# Altium PCB V2_Slit_Lamp_PCB.PcbDoc (part 2 of 2)
Units mm, origin at the board's own origin, x right, y up, seen from the top; angles counter-clockwise.
Board outline 40 x 62 mm, 2 copper layers (Top, Bottom); 34 components, 34 nets, 166 pads, 7 vias.
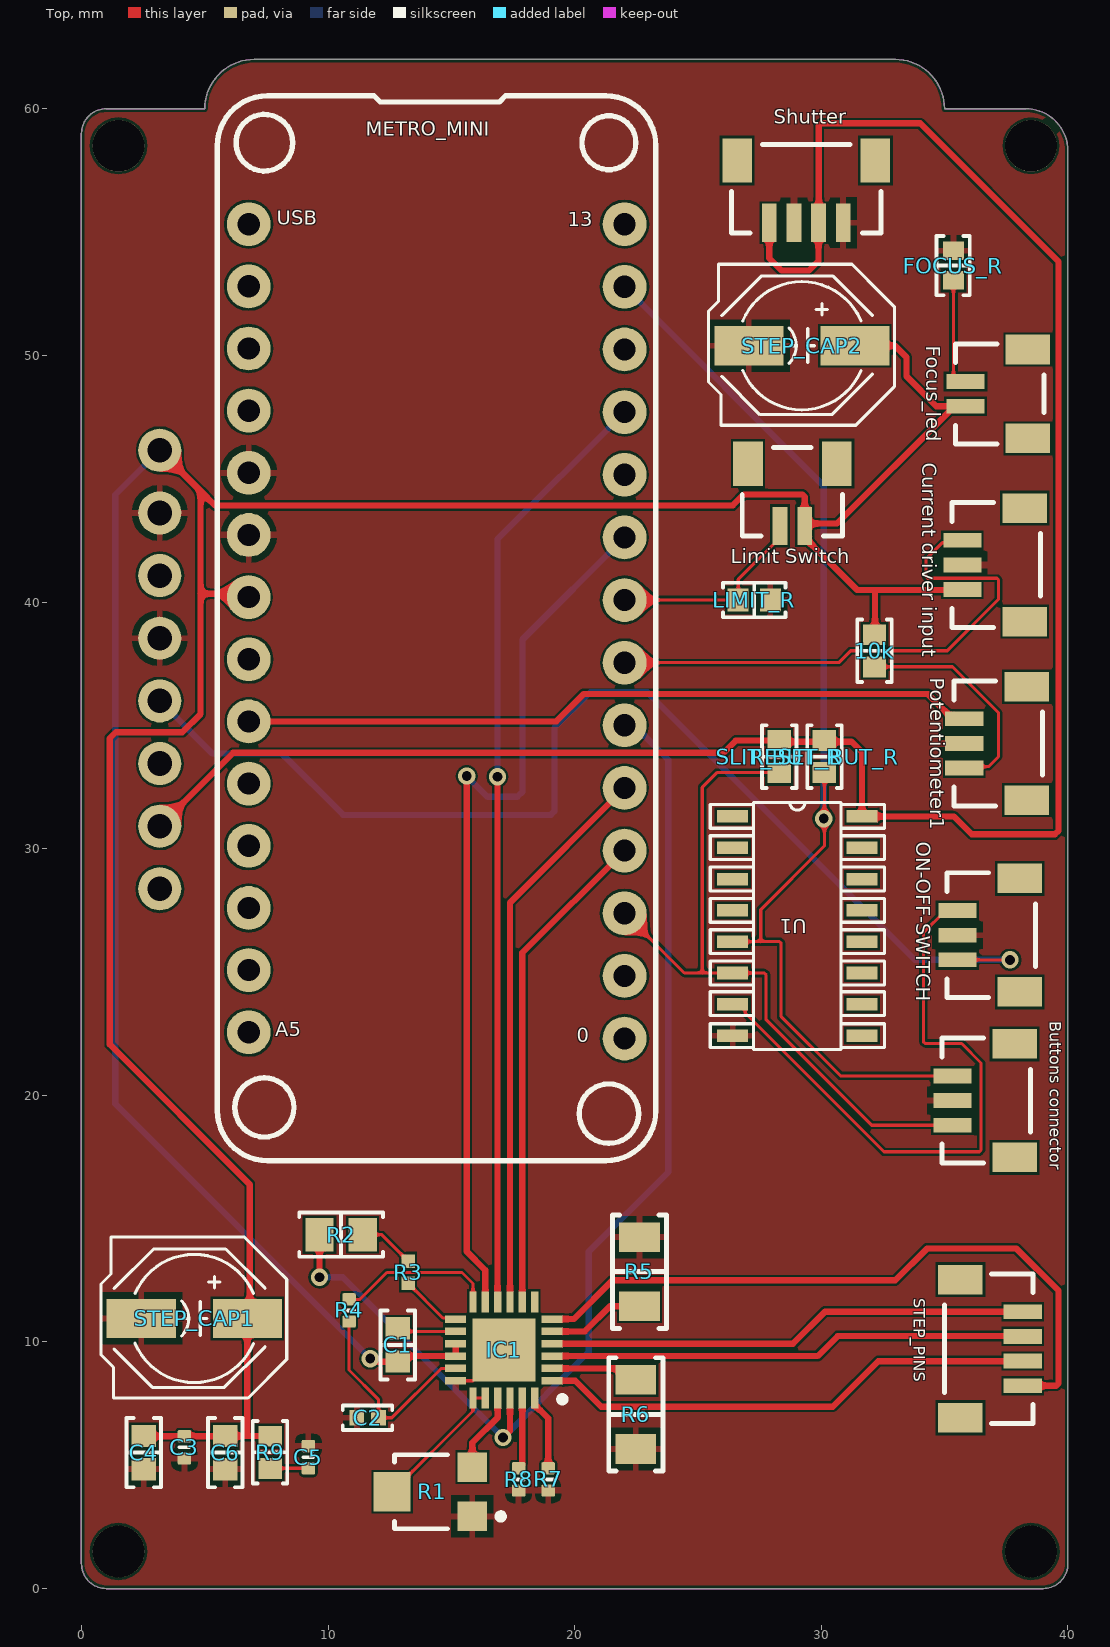
[diagram p0: Top view]

## Part data (continued)
R7 R8: library part CMP-009-00137-2, "Chip Resistor, 47,5 kOhms, +/-1 %, 63 mW, -55 to 155 degC, 0402", Case Code (Imperial)=0603, Case Code (Metric)=1608, Case/Package=0402, Manufacturer 1=Vishay, Manufacturer Part Number 1=CRCW060347R0FKEA, Max Operating Temperature=155°C, Max Power Dissipation=100mW, Min Operating Temperature=-55°C, Package Quantity=10, Power=63mW, Resistance=47R, Supplier Part Number 1=541-47.0HCT-ND, Temperature Coefficient=100ppm/°C, Tolerance=1%, Voltage Rating=75V, Category="Chip SMD Resistors", ComponentLink1Description=https://datasheet.ciiva.com:443/pdfs/VipMasterIC/IC/VISH/VISH-S-A0007266705/VISH-S-A0007266705-1.pdf?src-supplier=IHS+Markit, ComponentLink1URL=https://datasheet.ciiva.com:443/pdfs/VipMasterIC/IC/VISH/VISH-S-A0007266705/VISH-S-A0007266705-1.pdf?src-supplier=IHS+Markit, ComponentLink2Description=https://datasheet.ciiva.com/11810/0900766b80d98afc-11810171.pdf?src-supplier=RSComponents, ComponentLink2URL=https://datasheet.ciiva.com/11810/0900766b80d98afc-11810171.pdf?src-supplier=RSComponents, ComponentLink3Description=https://datasheet.ciiva.com/3257/dcrcwe3-3257637.pdf?src-supplier=Avnet, ComponentLink3URL=https://datasheet.ciiva.com/3257/dcrcwe3-3257637.pdf?src-supplier=Avnet, ComponentLink4Description=https://datasheet.ciiva.com/7777/1697337-7777333.pdf?src-supplier=Element14, ComponentLink4URL=https://datasheet.ciiva.com/7777/1697337-7777333.pdf?src-supplier=Element14, ComponentLink5Description=https://datasheet.ciiva.com/22872/70201119-22872069.pdf?src-supplier=Allied+Electronics, ComponentLink5URL=https://datasheet.ciiva.com/22872/70201119-22872069.pdf?src-supplier=Allied+Electronics, ComponentLink6Description=https://datasheet.ciiva.com/7777/1697337-7777334.pdf?src-supplier=Element14, ComponentLink6URL=https://datasheet.ciiva.com/7777/1697337-7777334.pdf?src-supplier=Element14, ComponentLink7Description=https://datasheet.ciiva.com/2465/dcrcwe3-2465675.pdf?src-supplier=Digi-Key, ComponentLink7URL=https://datasheet.ciiva.com/2465/dcrcwe3-2465675.pdf?src-supplier=Digi-Key, ComponentLink8Description=https://datasheet.ciiva.com/2465/dcrcwe3-2465676.pdf?src-supplier=Digi-Key, ComponentLink8URL=https://datasheet.ciiva.com/2465/dcrcwe3-2465676.pdf?src-supplier=Digi-Key, ComponentLink9Description=https://datasheet.ciiva.com/5549/dcrcwe3-109170-5549100.pdf?src-supplier=Mouser, ComponentLink9URL=https://datasheet.ciiva.com/5549/dcrcwe3-109170-5549100.pdf?src-supplier=Mouser, ComponentLink10Description=https://datasheet.ciiva.com/16777/70201119-16777404.pdf?src-supplier=Allied+Electronics, ComponentLink10URL=https://datasheet.ciiva.com/16777/70201119-16777404.pdf?src-supplier=Allied+Electronics, ComponentLink11Description=https://datasheet.ciiva.com/22700/1697337-22700364.pdf?src-supplier=Element14, ComponentLink11URL=https://datasheet.ciiva.com/22700/1697337-22700364.pdf?src-supplier=Element14, ComponentLink12Description=https://datasheet.ciiva.com/2465/dcrcwe3-2465677.pdf?src-supplier=Digi-Key, ComponentLink12URL=https://datasheet.ciiva.com/2465/dcrcwe3-2465677.pdf?src-supplier=Digi-Key, ComponentLink13Description=https://datasheet.ciiva.com/26316/fld-crcw-e3-data-en-26316558.pdf?src-supplier=Distrelec, ComponentLink13URL=https://datasheet.ciiva.com/26316/fld-crcw-e3-data-en-26316558.pdf?src-supplier=Distrelec, Composition="Thick Film", Contact Plating=Tin, Depth=0.85mm, Features="Automotive AEC-Q200", Height=0.45mm, Lead Free="Lead Free", Length=1.55mm, Military Standard=Not, Mount="Surface Mount", Number of Pins=2, Number of Terminations=2, Packaging="Tape and Reel", Pins=2, Power Rating=100mW, Pricing 1="1=0.10000, 10=0.03300, 100=0.01340, 1000=0.00602, 2500=0.00522 (USD)", Radiation Hardening=No, REACH SVHC=Unknown, RoHS=Yes, Stock 1=1712, Supplier 1=Digi-Key, Termination=SMD/SMT, Voltage Rating (DC)=75V, Weight=7.1E-05oz, Width=0.033inch
R9: library part "1 ohm RES", "Fixed Resistor, Metal Glaze/thick Film, 0.1W, 1ohm, 75V, 1% +/-Tol, 100ppm/Cel, Surface Mount, 0603", Case Code (Imperial)=0603, Case Code (Metric)=1608, Manufacturer 2="Vishay Dale", Manufacturer Part Number 2=CRCW06031R00FKEA, Max Operating Temperature=155°C, Max Power Dissipation=100mW, Min Operating Temperature=-55°C, Package Quantity=10, Resistance=1R, Supplier Part Number 1=541-1.00HCT-ND, Temperature Coefficient=100ppm/°C, Tolerance=1%, Voltage Rating=75V, Case/Package=0603, Category="Chip SMD Resistors", ComponentLink1Description=https://datasheet.ciiva.com:443/pdfs/VipMasterIC/IC/VISH/VISH-S-A0007266705/VISH-S-A0007266705-1.pdf?src-supplier=IHS+Markit, ComponentLink1URL=https://datasheet.ciiva.com:443/pdfs/VipMasterIC/IC/VISH/VISH-S-A0007266705/VISH-S-A0007266705-1.pdf?src-supplier=IHS+Markit, ComponentLink2Description=https://datasheet.ciiva.com/7792/1359337-7792119.pdf?src-supplier=Element14, ComponentLink2URL=https://datasheet.ciiva.com/7792/1359337-7792119.pdf?src-supplier=Element14, ComponentLink3Description=https://datasheet.ciiva.com/2465/dcrcwe3-2465529.pdf?src-supplier=Digi-Key, ComponentLink3URL=https://datasheet.ciiva.com/2465/dcrcwe3-2465529.pdf?src-supplier=Digi-Key, ComponentLink4Description=https://datasheet.ciiva.com/3257/dcrcwe3-3257225.pdf?src-supplier=Avnet, ComponentLink4URL=https://datasheet.ciiva.com/3257/dcrcwe3-3257225.pdf?src-supplier=Avnet, ComponentLink5Description=https://datasheet.ciiva.com/16883/dcrcwe3-16883290.pdf?src-supplier=Avnet+Europe, ComponentLink5URL=https://datasheet.ciiva.com/16883/dcrcwe3-16883290.pdf?src-supplier=Avnet+Europe, ComponentLink6Description=https://datasheet.ciiva.com/16768/70201119-16768957.pdf?src-supplier=Allied+Electronics, ComponentLink6URL=https://datasheet.ciiva.com/16768/70201119-16768957.pdf?src-supplier=Allied+Electronics, ComponentLink7Description=https://datasheet.ciiva.com/28621/1747939-28621389.pdf?src-supplier=Element14, ComponentLink7URL=https://datasheet.ciiva.com/28621/1747939-28621389.pdf?src-supplier=Element14, ComponentLink8Description=https://datasheet.ciiva.com/5541/dcrcwe3-109170-5541726.pdf?src-supplier=Mouser, ComponentLink8URL=https://datasheet.ciiva.com/5541/dcrcwe3-109170-5541726.pdf?src-supplier=Mouser, ComponentLink9Description=https://datasheet.ciiva.com/2465/dcrcwe3-2465528.pdf?src-supplier=Digi-Key, ComponentLink9URL=https://datasheet.ciiva.com/2465/dcrcwe3-2465528.pdf?src-supplier=Digi-Key, ComponentLink10Description=https://datasheet.ciiva.com/2465/dcrcwe3-2465530.pdf?src-supplier=Digi-Key, ComponentLink10URL=https://datasheet.ciiva.com/2465/dcrcwe3-2465530.pdf?src-supplier=Digi-Key, ComponentLink11Description=https://datasheet.ciiva.com/3257/dcrcwe3-3257226.pdf?src-supplier=Avnet, ComponentLink11URL=https://datasheet.ciiva.com/3257/dcrcwe3-3257226.pdf?src-supplier=Avnet, Composition="Thick Film", Contact Plating=Tin, Depth=0.85mm, Features="Automotive AEC-Q200", Height=0.02inch, Lead Free="Lead Free", Length=1.55mm, Military Standard=Not, Mount="Surface Mount", Number of Pins=2, Number of Terminations=2, Packaging="Tape and Reel", Power Rating=100mW, Pricing 2="5000=0.00400, 10000=0.00400 (USD)", Radiation Hardening=No, REACH SVHC=Unknown, RoHS=Yes, Stock 2=110000, Supplier 1=Digi-Key, Supplier 2=Newark, Supplier Part Number 2=52K8059, Termination=SMD/SMT, Voltage Rating (DC)=75V, Weight=7.1E-05oz, Width=0.033inch
Shutter STEP_PINS: library part BM04B-SRSS-TB, "JST SH series header 1.00mm pitch disconnectable crimp style connectors, vertical (side entry type), 4 pins", Color=Natural, Contact Resistance=40mR, Current Rating=1A, Flammability Rating="UL94 V-0", Housing Color=Beige, Insulation Resistance=100MR, Manufacturer 1=JST, Manufacturer Part Number 1=BM04B-SRSS-TB(LF)(SN), Max Operating Temperature=85°C, Max Voltage Rating (AC)=50V, Min Operating Temperature=-25°C, Supplier Part Number 1=455-1790-1-ND, ComponentLink1Description=https://datasheet.ciiva.com/26894/getdatasheetpartid-690899-26894827.pdf?src-supplier=Verical, ComponentLink1URL=https://datasheet.ciiva.com/26894/getdatasheetpartid-690899-26894827.pdf?src-supplier=Verical, ComponentLink2Description=https://datasheet.ciiva.com/26924/getdatasheetpartid-708793-26924043.pdf?src-supplier=Verical, ComponentLink2URL=https://datasheet.ciiva.com/26924/getdatasheetpartid-708793-26924043.pdf?src-supplier=Verical, ComponentLink3Description=https://datasheet.ciiva.com/16211/esr-16211085.pdf?src-supplier=Future+Electronics, ComponentLink3URL=https://datasheet.ciiva.com/16211/esr-16211085.pdf?src-supplier=Future+Electronics, Connector Type="Male Pin", Contact Material="Copper Alloy", Contact Plating=Tin,Lead,Copper, Depth=2.9mm, DeviceName=-TB, DeviceSetName=BM04B-SRSS, GateName_1=G$1, Gender=Male, Housing Material=Polyamide, Lead Free="Lead Free", Lead Pitch=1mm, Length=6mm, LibraryName="con-JST SH", Material=Polyamide, Max Current Rating=1A, Max Voltage Rating (DC)=50V, Mount="Surface Mount", Number of Contacts=4, Number of Positions=4, Number of Rows=1, Orientation=Straight, Packaging="Tape and Reel", Pitch=0.039inch, Pricing 1="1=0.630000, 10=0.592000, 100=0.454000, 500=0.394800 (USD)", REACH SVHC="No SVHC", RoHS=Yes, Stock 1=5100, Supplier 1=Digi-Key, Supplier 2=Arrow, Supplier Part Number 2="BM04B-SRSS-TB (LF)(SN)", SymbolName_1=M_1R04, Termination=Solder, Voltage Rating (AC)=50V
STEP_CAP1 STEP_CAP2: library part 100UF-POLARIZED_SMD_16V-20%_L6.6-W6.6, "100uF/ 16V", Capacitance=100uF, Case/Package=Radial, Dielectric Material=Aluminium, ESR (Equivalent Series Resistance)=360mR, Leakage Current=3uA, Manufacturer="Panasonic Electronic Components", Max Operating Temperature=105°C, Min Operating Temperature=-55°C, MPN=EEE-FK1C101P, Package Quantity=1000, Ripple Current=240mA, Supplier Part Number 1=PCE3783CT-ND, Tolerance=20%, Voltage=16V, +=+, ComponentLink1Description=https://datasheet.ciiva.com/19479/1357482-19479360.pdf?src-supplier=Jameco, ComponentLink1URL=https://datasheet.ciiva.com/19479/1357482-19479360.pdf?src-supplier=Jameco, ComponentLink2Description=https://datasheet.ciiva.com/11777/0900766b80e4e8b0-11777237.pdf?src-supplier=RSComponents, ComponentLink2URL=https://datasheet.ciiva.com/11777/0900766b80e4e8b0-11777237.pdf?src-supplier=RSComponents, ComponentLink3Description=https://datasheet.ciiva.com/29313/443464-da-01-en-smd-elko-vfk-d-100-uf-16v-29313488.pdf?src-supplier=Conrad, ComponentLink3URL=https://datasheet.ciiva.com/29313/443464-da-01-en-smd-elko-vfk-d-100-uf-16v-29313488.pdf?src-supplier=Conrad, ComponentLink4Description=https://datasheet.ciiva.com/2983/aba0000ce120-2983939.pdf?src-supplier=Avnet, ComponentLink4URL=https://datasheet.ciiva.com/2983/aba0000ce120-2983939.pdf?src-supplier=Avnet, ComponentLink5Description=https://datasheet.ciiva.com/43463/58258-43463495.pdf?src-supplier=Farnell, ComponentLink5URL=https://datasheet.ciiva.com/43463/58258-43463495.pdf?src-supplier=Farnell, ComponentLink6Description=https://datasheet.ciiva.com/46376/1676921-46376425.pdf?src-supplier=Element14, ComponentLink6URL=https://datasheet.ciiva.com/46376/1676921-46376425.pdf?src-supplier=Element14, ComponentLink7Description=https://datasheet.ciiva.com/24022/aba0000ce120-24022554.pdf?src-supplier=Mouser, ComponentLink7URL=https://datasheet.ciiva.com/24022/aba0000ce120-24022554.pdf?src-supplier=Mouser, ComponentLink8Description=https://datasheet.ciiva.com/16539/aba0000ce120-16539980.pdf?src-supplier=Avnet+Asia, ComponentLink8URL=https://datasheet.ciiva.com/16539/aba0000ce120-16539980.pdf?src-supplier=Avnet+Asia, ComponentLink9Description=https://datasheet.ciiva.com/25899/aba0000ce120-25899324.pdf?src-supplier=Avnet+Europe, ComponentLink9URL=https://datasheet.ciiva.com/25899/aba0000ce120-25899324.pdf?src-supplier=Avnet+Europe, ComponentLink10Description=https://datasheet.ciiva.com/30177/aba0000ce120-30177788.pdf?src-supplier=Onlinecomponents.com, ComponentLink10URL=https://datasheet.ciiva.com/30177/aba0000ce120-30177788.pdf?src-supplier=Onlinecomponents.com, ComponentLink11Description=https://datasheet.ciiva.com/14601/70255214-14601005.pdf?src-supplier=Allied+Electronics, ComponentLink11URL=https://datasheet.ciiva.com/14601/70255214-14601005.pdf?src-supplier=Allied+Electronics, ComponentLink12Description=https://datasheet.ciiva.com/16449/aba0000ce120-16449534.pdf?src-supplier=Future+Electronics, ComponentLink12URL=https://datasheet.ciiva.com/16449/aba0000ce120-16449534.pdf?src-supplier=Future+Electronics, ComponentLink13Description=https://datasheet.ciiva.com/46387/1676921-46387918.pdf?src-supplier=Element14, ComponentLink13URL=https://datasheet.ciiva.com/46387/1676921-46387918.pdf?src-supplier=Element14, CREATOR=MrSwirlyEyes, DATASHEET=http://industrial.panasonic.com/www-cgi/jvcr13pz.cgi?E+PZ+3+ABA0120+EEEFK1C101P+7+WW, DeviceName=_SMD_16V-20%_L6.6-W6.6, DeviceSetName=100UF-POLARIZED, Diameter=6.3mm, DIST=Digikey, DISTLINK=https://www.digikey.com/products/en?keywords=PCE3783CT-ND, DISTPN=PCE3783CT-ND, GateName_1=G$1, Height=5.8mm, Height - Seated (Max)=0.24inch, Impedance=360mR, Length=5.8mm, LibraryName=PiB_capacitors, Life (Hours)=2000Hour, Material=Aluminium, Mount="Surface Mount,PCB", Number of Pins=2, Packaging="Tape and Reel", Polarity=Polar, Radiation Hardening=No, REACH SVHC="No SVHC", Ripple Current (AC)=240mA, RoHS=Yes, Supplier 1=Digi-Key, Supplier 2=Arrow, Supplier Part Number 2=EEEFK1C101P, SymbolName_1=CAPACITOR_POLARIZED, Termination=SMD/SMT, TESTED=NO, Voltage Rating=16V, Voltage Rating (DC)=16V
U1: "SR Latch", Manufacturer="Texas Instruments", Supplier Part Number 1=296-29449-1-ND, BUILT_BY=EMA_UL_Team, DeviceSetName=SN74LS279ADR, GateName_1=A, LibraryName=SRlatch, MANUFACTURER_PART_NUMBER=SN74LS279ADR, Supplier 1=Digi-Key, Supplier 2=Mouser, Supplier Part Number 2=595-SN74LS279ADR, SymbolName_1=SN74LS279A_D_16, VENDOR=Vendor
METRO_MINI: DeviceSetName=ADAFRUIT_METRO_MINI, GateName_1=G$1, LibraryName=adafruit_metro_mini, Package=ADAFRUIT_METRO_MINI, SymbolName_1=ADAFRUIT_METRO_MINI

## Free pads (board coordinates)
  round 2.1 hole 2.1 unplated: MH1(38.5,58.5) MH2(1.5,58.5) MH3(1.5,1.5) MH4(38.5,1.5)

## Via types
v1: diameter 0.7, hole 0.4, Top to Bottom, 7 vias

## Nets (pads, with @x,y where several pads share a name; then routed paths per layer and width w, separated by ;. In a path a pad name is that pad's centre, name@x,y a point inside that pad or via, vN(x,y) a via of type N, cw(c..) or ccw(c..) an arc to the next point about the centre after c; other vN are vias at no path point)
5V: 10k.2 "Current driver input.3" "Limit Switch.2" C1.1 C3.1 C4.1 C6.1 Focus_led.2 IC1.15 IC1.16 METRO_MINI.VIN POWER_1000C.5V R9.1 STEP_CAP1.A STEP_CAP2.A | length 148.8
  Top w0.254: C4.1 2.538,6.175 C3.1 5.816,6.175 C6.1 6.725,6.187 7.638,6.187 R9.1 ; POWER_1000C.5V 4.826,44.501 ; 6.725,6.204 STEP_CAP1.A ; METRO_MINI.VIN 6.645,40.335 4.826,40.335 ; STEP_CAP1.A@6.825,11.025 6.825,16.383 1.147,22.061 1.147,34.471 1.397,34.722 4.089,34.722 4.826,35.458 4.826,40.335 ; v1(11.709,9.322) 11.831,9.2 C1.1 13.05,9.425 IC1.16 IC1.15 ; STEP_CAP2.A 32.987,50.394 33.452,49.929 33.452,49.149 34.663,47.938 Focus_led.2@35.372,47.938 ; 10k.2 32.175,38.692 32.175,40.402 ; 35.72,40.504 35.704,40.488 31.45,40.488 29.325,42.613 29.325,43.088 ; Focus_led.2 Focus_led.2@35.372,47.938 ; 4.826,40.335 4.826,44.501 ; 4.826,44.501 5.41,43.917 26.416,43.917 26.862,44.363 29.221,44.363 29.325,44.259 29.325,43.18 29.325,43.088 ; 29.325,43.088 29.418,43.18 30.632,43.18 35.199,47.747 35.199,47.765 Focus_led.2@35.372,47.938
  Bottom w0.254: POWER_1000C.5V 1.372,44.348 1.372,19.66 v1(11.709,9.322)
GND: "Buttons connector.2" "Current driver input.2" C2.2 C3.2 C4.2 C5.2 C6.2 FOCUS_R.2 IC1.18 IC1.25 LIMIT_R.1 METRO_MINI.GND ON-OFF-SWITCH.2 Potentiometer1.2 POWER_1000C.GND R1.1 R5.1 R6.1 R7.2 R8.2 Shutter.2 Shutter.4 STEP_CAP1.K STEP_CAP2.K U1.8 | length 2.5
  Top w0.127: IC1.18 15.875,8.425 IC1.25
Net10k_1: 10k.1 Potentiometer1.3 | length 9.2
  Top w0.127: 10k.1 35.321,37.374 37.186,35.509 37.186,33.731 36.779,33.325 35.856,33.325 Potentiometer1.3
"NetButtons connector_1": "Buttons connector.1" METRO_MINI.12 RESET_BUT_R.2 U1.5 | length 45.8
  Top w0.127: U1.5 27.542,26.229 ; RESET_BUT_R.2@30.124,33.131 30.124,30.105 27.542,27.523 27.542,26.229 ; 35.314,20.787 30.775,20.787 28.372,23.19 28.372,26.162 28.305,26.229 27.542,26.229
  Bottom w0.254: METRO_MINI.12 30.099,44.704 v1(30.099,31.217)
"NetButtons connector_3": "Buttons connector.3" METRO_MINI.2 SLIT_BUT_R.1 U1.6 | length 28.8
  Top w0.127: METRO_MINI.2 24.444,24.959 25.171,24.959 ; SLIT_BUT_R.1 25.766,33.081 25.171,32.487 25.171,24.959 ; 35.314,18.787 32.039,18.787 27.762,23.063 27.762,24.884 27.688,24.959 U1.6 25.171,24.959
NetC1_2: C1.2 IC1.14 | length 2.4
  Top w0.127: C1.2 12.95,10.425 IC1.14
NetC2_1: C2.1 IC1.17 R4.1 | length 8.4
  Top w0.127: R4.1 10.85,8.86 12.04,7.67 C2.1 12.588,6.925 14.586,8.923 15.173,8.923 IC1.17
NetC5_1: C5.1 R9.2 | length 1.6
  Top w0.127: R9.2 C5.1
"NetCurrent driver input_1": "Current driver input.1" METRO_MINI.6 | length 22.6
  Top w0.127: METRO_MINI.6 30.709,37.541 31.191,38.024 35.103,38.024 37.186,40.107 37.186,40.901 37.119,40.967 34.306,40.967 34.239,41.034 34.239,41.732 34.909,42.402 35.842,42.402
NetFocus_led_1: Focus_led.1 FOCUS_R.1 | length 4.5
  Top w0.127: FOCUS_R.1 35.357,49.174 35.593,48.938 Focus_led.1
NetIC1_1: IC1.1 STEP_PINS.2 | length 20.3
  Top w0.254: IC1.1 20.025,8.425 21.075,7.375 30.464,7.375 32.309,9.22 38.158,9.22 STEP_PINS.2
NetIC1_2: IC1.2 R6.2 | length 2.8
  Top w0.254: IC1.2 R6.2@21.875,8.925
NetIC1_3: IC1.3 STEP_PINS.3 | length 19.4
  Top w0.254: IC1.3 21.654,9.425 21.656,9.427 23.494,9.427 23.496,9.425 29.847,9.425 30.658,10.236 38.151,10.236 STEP_PINS.3
NetIC1_4: IC1.4 STEP_PINS.4 | length 19.6
  Top w0.254: IC1.4 28.848,9.925 30.148,11.225 STEP_PINS.4
NetIC1_5: IC1.5 R5.2 | length 4
  Top w0.254: IC1.5 20.406,10.425 21.431,11.45 R5.2
NetIC1_6: IC1.6 STEP_PINS.1 | length 27.7
  Top w0.254: IC1.6 19.961,10.925 21.533,12.497 32.995,12.497 34.286,13.789 37.9,13.789 39.619,12.07 39.619,8.329 39.515,8.225 STEP_PINS.1
NetIC1_7: IC1.7
NetIC1_8: IC1.8 METRO_MINI.3 | length 20
  Top w0.254: IC1.8 17.875,25.774 METRO_MINI.3
NetIC1_9: IC1.9 METRO_MINI.4 | length 22.8
  Top w0.254: IC1.9 17.375,27.814 METRO_MINI.4
NetIC1_10: IC1.10 METRO_MINI.10 | length 38.2
  Top w0.254: v1(16.866,32.918) 16.866,11.634 IC1.10
  Bottom w0.254: v1(16.866,32.918) 16.866,42.545 METRO_MINI.10
NetIC1_11: IC1.11 METRO_MINI.8 | length 36.4
  Top w0.254: v1(15.621,32.944) 15.621,13.665 16.375,12.911 IC1.11
  Bottom w0.254: v1(15.621,32.944) 16.459,32.106 17.678,32.106 17.882,32.309 17.882,38.481 METRO_MINI.8
NetIC1_12: IC1.12 R4.2 | length 6.4
  Top w0.127: R4.2 11.293,11.725 12.382,12.814 15.431,12.814 15.875,12.37 IC1.12
NetIC1_13: IC1.13 R3.1 | length 2.5
  Top w0.127: R3.1 14.653,10.972 14.853,10.972 IC1.13@14.9,10.925
  Top w0.254: IC1.13@14.9,10.925 IC1.13
NetIC1_19: IC1.19 IC1.20 R1.2 | length 5.7
  Top w0.127: R1.2 15.875,7.2 IC1.19 IC1.20
NetIC1_21: IC1.21 R1.3 | length 3.2
  Top w0.254: R1.3 15.85,5.912 16.875,6.937 IC1.21
NetIC1_22: IC1.22 METRO_MINI.5 R2.1 | length 46.2
  Top w0.127: v1@9.65,12.626 v1(9.652,12.624)
  Top w0.254: v1@9.65,12.626 R2.1 ; v1(17.094,6.121) 17.375,6.402 IC1.22
  Bottom w0.254: v1(9.652,12.624) 10.592,12.624 v1(17.094,6.121) 20.574,9.601 20.574,13.665 23.796,16.887 23.796,33.608 22.403,35.001 METRO_MINI.5
NetIC1_23: IC1.23 R8.1 | length 2.9
  Top w0.127: R8.1 R8.1@17.875,5.025
  Top w0.254: R8.1@17.875,5.025 IC1.23
NetIC1_24: IC1.24 R7.1 | length 3.1
  Top w0.254: IC1.24 18.375,7.45 18.925,6.9 R7.1
"NetLimit Switch_1": "Limit Switch.1" LIMIT_R.2 METRO_MINI.7 | length 8.3
  Top w0.127: METRO_MINI.7 LIMIT_R.2 26.63,40.917 28.325,42.613 28.325,43.088
NetMETRO_MINI_A0: METRO_MINI.A0 Potentiometer1.1 | length 29.9
  Top w0.254: METRO_MINI.A0 19.257,35.158 20.371,36.271 34.315,36.271 35.321,35.265 Potentiometer1.1
NetON-OFF-SWITCH_1: ON-OFF-SWITCH.1 U1.7 | length 25.1
  Top w0.127: U1.7 26.722,23.689 26.913,23.498 26.913,23.338 32.539,17.712 36.408,17.712 36.474,17.778 36.474,21.311 35.687,22.098 34.212,22.098 34.138,22.172 34.138,26.588 35.042,27.492 ON-OFF-SWITCH.1
NetON-OFF-SWITCH_3: ON-OFF-SWITCH.3 POWER_1000C.EN | length 47.1
  Top w0.127: ON-OFF-SWITCH.3 v1(37.652,25.492) v1@37.668,25.476
  Bottom w0.254: POWER_1000C.EN 5.309,33.858 8.128,33.858 10.617,31.369 19.028,31.369 19.177,31.518 19.177,34.9 20.625,36.347 22.936,36.347 33.791,25.492 v1(37.652,25.492)
NetR2_2: R2.2 R3.2 | length 2.3
  Top w0.127: R2.2 12.175,14.35 R3.2
VBAT: POWER_1000C.VBAT RESET_BUT_R.1 Shutter.1 Shutter.3 SLIT_BUT_R.2 U1.16 | length 85.5
  Top w0.254: POWER_1000C.VBAT 6.148,33.885 26.037,33.885 26.533,34.381 SLIT_BUT_R.2 28.346,34.331 30.124,34.331 31.226,34.331 31.649,33.908 U1.16 35.371,31.309 36.099,30.582 39.47,30.582 39.619,30.73 39.619,53.797 34.006,59.411 29.999,59.411 29.896,59.307 29.896,55.385 Shutter.3 29.888,53.837 29.489,53.439 28.397,53.439 27.888,53.948 Shutter.1
pads on no net: "Buttons connector.M" "Current driver input.M" "Limit Switch.M" Focus_led.M METRO_MINI.0 METRO_MINI.1 METRO_MINI.3V METRO_MINI.5V METRO_MINI.9 METRO_MINI.11 METRO_MINI.13 METRO_MINI.A1 METRO_MINI.A2 METRO_MINI.A3 METRO_MINI.A4 METRO_MINI.A5 METRO_MINI.AREF METRO_MINI.RST METRO_MINI.USB ON-OFF-SWITCH.M Potentiometer1.M POWER_1000C.LB0 POWER_1000C.USB POWER_1000C.VS Shutter.M STEP_PINS.M U1.1 U1.2 U1.3 U1.4 U1.9 U1.10 U1.11 U1.12 U1.13 U1.14 U1.15

## Polygon pours and split planes (outlines as drawn)
no net on Bottom "NONET_L02_P060" (solid, pour order 60): 0,3.343 40.462,3.343 40.462,66.055 40.335,66.182 0,66.182
GND on Bottom "GND_L02_P059" (solid, pour order 59): 0,0 40.462,0 40.462,62.713 40.335,62.84 0,62.84
GND on Top "GND_L01_P061" (solid, pour order 61): 0,0 40.462,0 40.462,62.713 40.335,62.84 0,62.84

## Keep-outs
Keep-Out Layer:
  the board outline again, w0

## Silkscreen, mask and mechanical layers (free items; w line width, h text height)
Top Overlay:
  text "USB" at 7.925,55.093 h1
  text "13" at 19.71,55.042 h1
  text "A5" at 7.849,22.2 h1
  text "0" at 20.091,21.946 h1
Dimension:
  the board outline again, w0
Board Outline:
  lines w0.1: 0,0.94 0,59.055 cw(c0.858,59.055) 0.251,59.662 0.315,59.725 cw(c0.965,59.075) 0.965,59.995 5.004,59.995 5.004,60.186 cw(c6.565,60.186) 5.461,61.29 5.58,61.409 cw(c7.01,59.978) 7.01,62.001 33.147,62.001 ; 0,1 ccw(c1,1) 1,0 1.067,0 38.777,0 ccw(c38.777,1.432) 39.789,0.419 ccw(c39.269,0.94) 40.005,0.94 40.005,58.42 ccw(c38.595,58.42) 39.592,59.417 39.472,59.538 ccw(c38.368,58.434) 38.368,59.995 38.293,59.995 35.001,59.995 35.001,60.186 ccw(c33.44,60.186) 34.544,61.29 34.425,61.409 ccw(c32.995,59.978) 32.995,62.001 6.858,62.001